# EAGLE board Tiny841 (EAGLE 7.4.0)

Size 160 x 100 mm. Coordinates in mm from the lower left corner, seen from the top.
Outline: 0,0 160,0 160,100 0,100 0,0
Copper layers (1*16): Top 0.035mm / dielectric 1.5mm / Bottom 0.035mm
Design rules "default": minimum track width 10mil, minimum drill 24mil, track to track 8mil, track to pad 8mil, pad to pad 8mil, via to via 8mil, smd to smd 8mil, copper to edge 40mil, drill to drill 8mil, minimum pad ring 10mil, minimum via ring 8mil, stop-mask expansion 4mil, vias tented up to drill 0mil, thermal gap 10mil

## Footprints (pad centres in the part's own frame; a part is rotated, then mirrored left to right if it is on the bottom)
SOIC14 = smd 0.61 x 2.21: 1 -3.81,-2.603; 2 -2.54,-2.603; 3 -1.27,-2.603; 4 0,-2.603; 5 1.27,-2.603; 6 2.54,-2.603; 7 3.81,-2.603; 8 3.81,2.603; 9 2.54,2.603; 10 1.27,2.603; 11 0,2.603; 12 -1.27,2.603; 13 -2.54,2.603; 14 -3.81,2.603
1X02 = drill 1.016 pad 1.88: 1 0,0; 2 2.54,0
1X03 = drill 1.016 pad 1.88: 1 0,0; 2 2.54,0; 3 5.08,0
R1206FAB = smd 1.27 x 1.905: 1 -1.651,0; 2 1.651,0
EFOBM = smd 0.8 x 3.9: 1 -1.35,0; 2 0,0; 3 1.35,0
2X03SMD = smd 2.54 x 1.27: 1 -2.54,2.54; 2 2.92,2.54; 3 -2.54,0; 4 2.92,0; 5 -2.54,-2.54; 6 2.92,-2.54

## Placement (x,y rotation side)
IC1  ATTINY44-SSU  [SOIC14]  12.7,16.89 270 top
J1  [1X02]  12.57,23.37 180 top
J2  [1X03]  1.65,8.76 90 top
J3  [1X03]  4.19,8.76 90 top
J4  [1X03]  6.73,8.76 90 top
J5  [1X02]  0,-11.18 0 top  (outside the outline)
R1  [R1206FAB]  0.64,-2.67 0 top
R2  [R1206FAB]  0.64,-6.48 0 top  (outside the outline)
U$2  RESONATOR  [EFOBM]  3.43,20.45 270 top
U$3  AVRISPSMD  [2X03SMD]  12.83,8.76 180 top

## Library data of the parts
IC1 R1 R2 U$2 U$3 = fab
J1-J5 = SparkFun-Connectors

## Nets
CURSENSE: IC1.12 J5.2
GND: IC1.14 J1.1 J2.1 J3.1 J4.1 J5.1 U$2.2 U$3.6
MOTSIG0: IC1.5 J2.3
MOTSIG1: IC1.6 J3.3
MOTSIG2: IC1.8 J4.3 U$3.1
N$5: IC1.3 U$2.3
N$6: IC1.2 U$2.1
RESET: IC1.4 U$3.5
SCL: IC1.9 R1.1 U$3.3
SDA: IC1.7 R2.1 U$3.4
VCC: IC1.1 J1.2 J2.2 J3.2 J4.2 R1.2 R2.2 U$3.2

## Tracks (layer width: path | path; a pad name or v marks a point on that pad's centre or on a via)
CURSENSE  (1 unrouted)
GND  (7 unrouted)
MOTSIG0  (1 unrouted)
MOTSIG1  (1 unrouted)
MOTSIG2  (2 unrouted)
N$5  (1 unrouted)
N$6  (1 unrouted)
RESET  (1 unrouted)
SCL  (2 unrouted)
SDA  (2 unrouted)
VCC  (7 unrouted)